# EAGLE board controller (EAGLE 7.3.0)
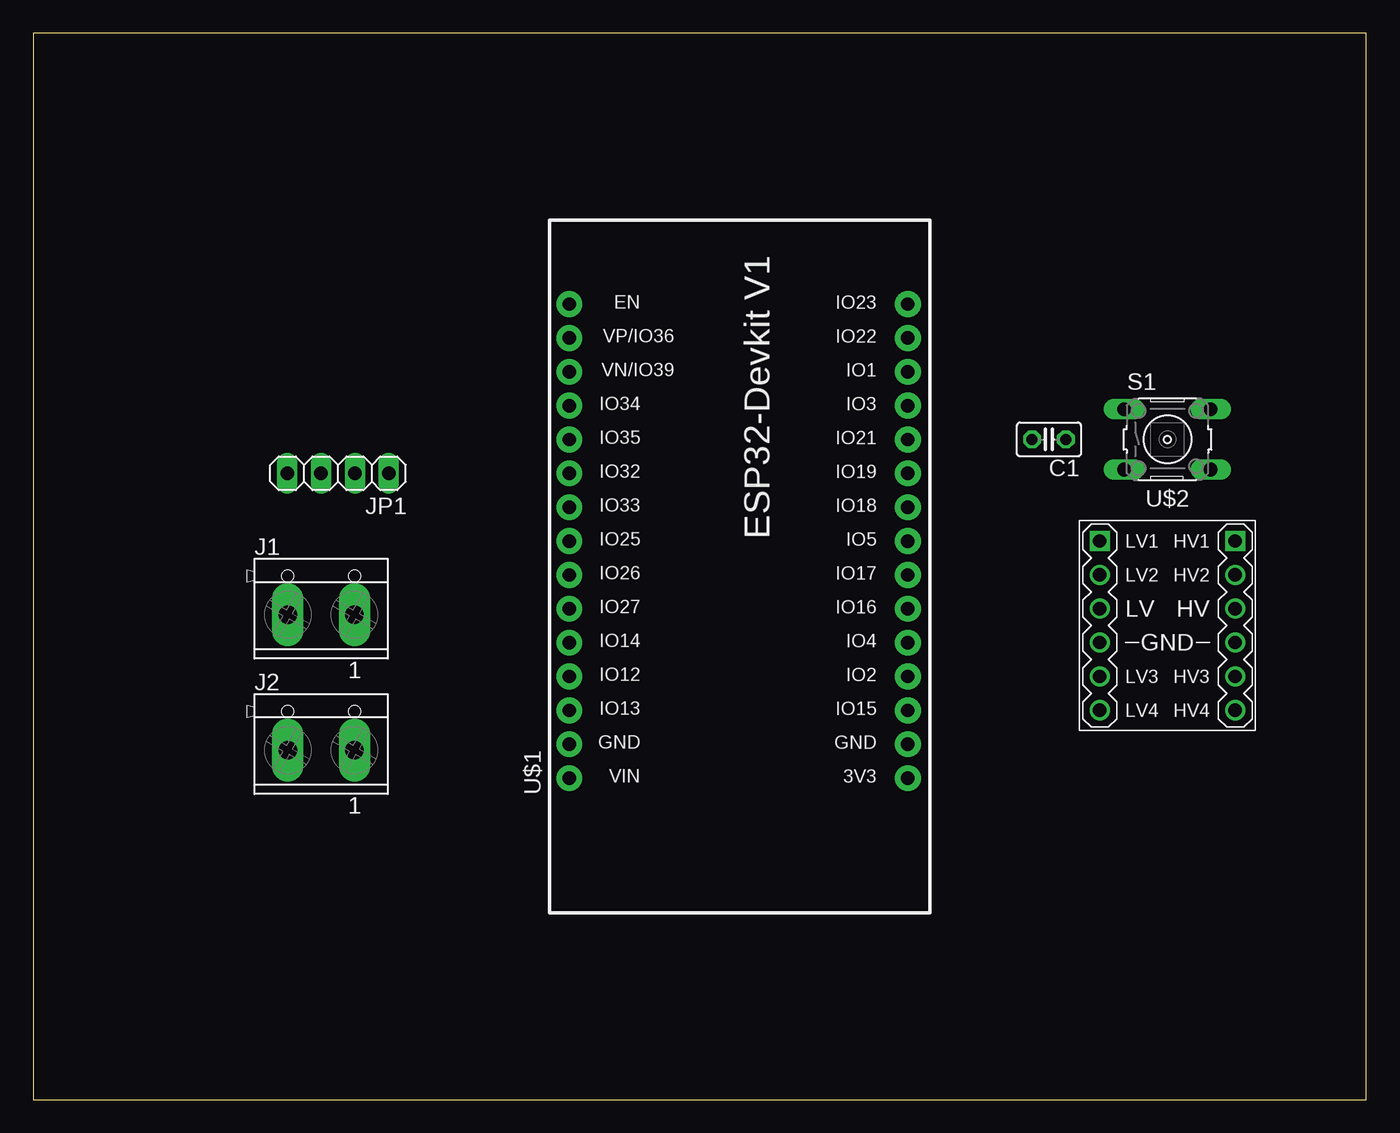
[diagram p0: board, top side]
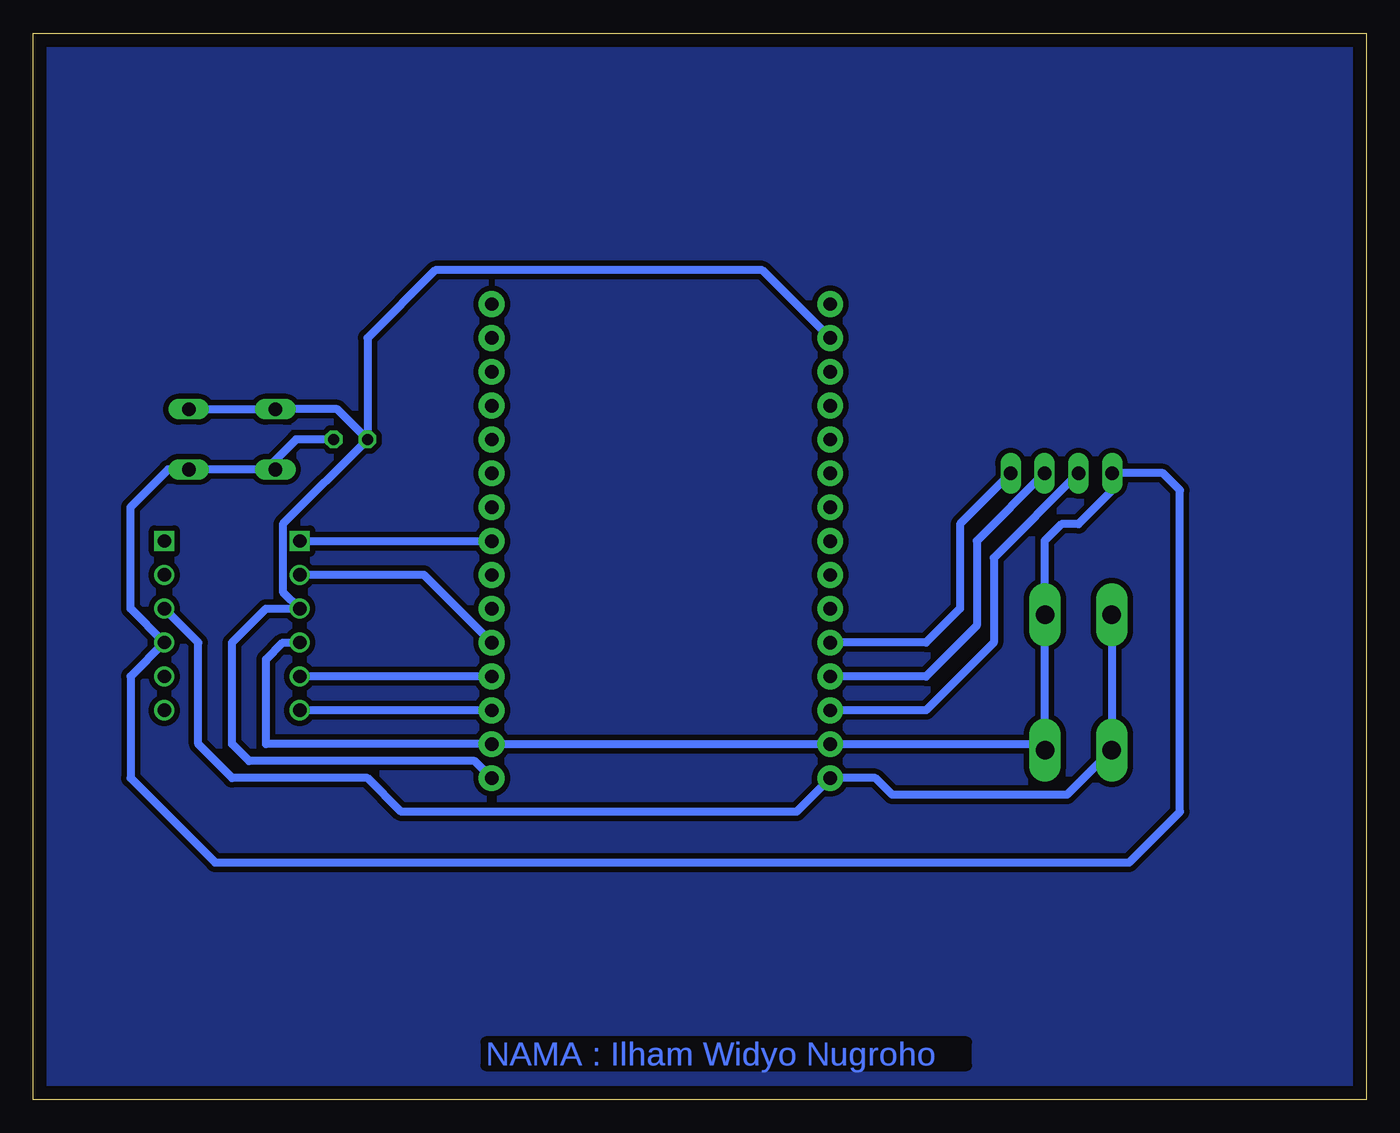
[diagram p1: board, bottom side, seen from below]

Size 100 x 80 mm. Coordinates in mm from the lower left corner, seen from the top.
Outline: 0,0 100,0 100,80 0,80 0,0
Copper layers (1*16): Top 0.035mm / dielectric 1.5mm / Bottom 0.035mm
Design rules "default": minimum track width 10mil, minimum drill 24mil, track to track 8mil, track to pad 8mil, pad to pad 8mil, via to via 8mil, smd to smd 8mil, copper to edge 40mil, drill to drill 8mil, minimum pad ring 10mil, minimum via ring 8mil, stop-mask expansion 4mil, vias tented up to drill 0mil, thermal gap 10mil

## Footprints (pad centres in the part's own frame; a part is rotated, then mirrored left to right if it is on the bottom)
C025-025X050 = drill 0.813 octagon: 1 -1.27,0; 2 1.27,0
TERMINAL_BLOCK_2P_5 = drill 1.4 pad 2.38 long: 1 2.5,-0.45; 2 -2.5,-0.45
1X04 = drill 1.016 long: 1 -3.81,0; 2 -1.27,0; 3 1.27,0; 4 3.81,0
B3F-10XX = drill 1.016 long: 1 -3.251,2.261; 2 3.251,2.261; 3 -3.251,-2.261; 4 3.251,-2.261
ESP32-DEVKITV1 = drill 1 pad 1.93: 3V3 -16.52,-12.27; D1 13.96,-12.27; D2 -8.9,-12.27; D3 11.42,-12.27; D4 -6.36,-12.27; D5 1.26,-12.27; D12 -8.9,13.135; D13 -11.44,13.135; D14 -6.36,13.135; D15 -11.44,-12.27; D16 -3.82,-12.27; D17 -1.28,-12.27; D18 3.8,-12.27; D19 6.34,-12.27; D21 8.88,-12.27; D22 16.5,-12.27; D23 19.04,-12.27; D25 1.26,13.135; D26 -1.28,13.135; D27 -3.82,13.135; D32 6.34,13.135; D33 3.8,13.135; D34 11.42,13.135; D35 8.88,13.135; D36 16.5,13.135; D39 13.96,13.135; EN 19.04,13.135; GND@1 -13.98,13.135; GND@2 -13.98,-12.27; VIN -16.52,13.135
LEVEL-SHIFTER-4CH = drill 1 square: J1.1 -5.08,6.35; J2.1 5.08,6.35 | drill 1: J1.2 -5.08,3.81; J1.3 -5.08,1.27; J1.4 -5.08,-1.27; J1.5 -5.08,-3.81; J1.6 -5.08,-6.35; J2.2 5.08,3.81; J2.3 5.08,1.27; J2.4 5.08,-1.27; J2.5 5.08,-3.81; J2.6 5.08,-6.35

## Placement (x,y rotation side)
C1  [C025-025X050]  76.2,49.53 180 top
J1  CON_TERMINAL_BLOCK_02-5MM  [TERMINAL_BLOCK_2P_5]  21.59,36.83 0 top
J2  CON_TERMINAL_BLOCK_02-5MM  [TERMINAL_BLOCK_2P_5]  21.59,26.67 0 top
JP1  [1X04]  22.86,46.99 180 top
S1  [B3F-10XX]  85.09,49.53 0 top
U$1  ESP32DEVKITV1  [ESP32-DEVKITV1]  53.34,40.64 90 top
U$2  LEVEL-SHIFTER-4CH  [LEVEL-SHIFTER-4CH]  85.09,35.56 0 top

## Library data of the parts
C1 = rcl; SPICEPREFIX: C
J1 J2 = tblok
JP1 = pinhead
S1 = switch-omron; MPN: B3F-1000; OC_FARNELL: 176432; OC_NEWARK: 36M3542
U$1 = esp32-devkitv1
U$2 = diy-model

## Nets
GND: C1.1 J1.1 J2.1 JP1.4 S1.3 S1.4 U$1.GND@1 U$1.GND@2 U$2.J1.4 U$2.J2.4
HV: J1.2 J2.2 U$1.VIN U$2.J2.3
LV: C1.2 S1.1 S1.2 U$1.3V3 U$1.D36 U$2.J1.3
LV1: U$1.D5 U$2.J1.1
LV2: U$1.D4 U$2.J1.2
LV3: U$1.D2 U$2.J1.5
LV4: U$1.D15 U$2.J1.6
OUT1: JP1.1 U$1.D14
OUT2: JP1.2 U$1.D12
OUT3: JP1.3 U$1.D13

## Tracks (layer width: path | path; a pad name or v marks a point on that pad's centre or on a via)
GND
  Bottom 0.61: S1.3 82.55,47.27 | 82.55,47.27 S1.4 89.89,47.27 92.71,44.45 92.71,36.83 U$2.J2.4 92.71,31.75 92.71,24.13 86.36,17.78 17.78,17.78 13.97,21.59 13.97,45.72 15.24,46.99 JP1.4 19.05,45.72 21.59,43.18 22.86,43.18 24.13,41.91 24.13,36.42 J1.1 24.13,36.34 24.13,25.4 24.09,25.44 J2.1 24.53,26.66 U$1.GND@1 40.64,26.67 40.65,26.66 U$1.GND@2 82.55,26.67 82.55,33.02 81.28,34.29 U$2.J1.4 | C1.1 80.29,49.53 82.55,47.27
HV
  Bottom 0.61: J1.2 J2.2 22.45,22.86 35.56,22.86 36.82,24.12 U$1.VIN 42.73,21.59 72.39,21.59 74.93,24.13 85.09,24.13 87.63,26.67 87.63,34.29 U$2.J2.3
LV
  Bottom 0.61: U$1.D36 45.3,62.23 69.85,62.23 74.93,57.15 C1.2 | C1.2 77.19,51.79 S1.1 S1.2 | C1.2 81.28,43.18 81.28,38.1 U$2.J1.3 82.55,36.83 85.09,34.29 85.09,26.67 83.82,25.4 66.89,25.4 U$1.3V3
LV1
  Bottom 0.61: U$2.J1.1 66.04,41.91 66.03,41.9 U$1.D5
LV2
  Bottom 0.61: U$1.D4 70.7,39.37 U$2.J1.2
LV3
  Bottom 0.61: U$1.D2 U$2.J1.5
LV4
  Bottom 0.61: U$1.D15 U$2.J1.6
N$1
  pour Bottom (isolate 0.406): 0,80.01 0,0 100.33,0 100.33,80.01
OUT1
  Bottom 0.61: JP1.1 30.48,43.18 30.48,36.83 33.03,34.28 U$1.D14
OUT2
  Bottom 0.61: JP1.2 29.21,41.91 29.21,35.56 33.03,31.74 U$1.D12
OUT3
  Bottom 0.61: JP1.3 27.94,40.64 27.94,34.29 33.03,29.2 U$1.D13

## Text on the board
Bottom: NAMA : Ilham Widyo Nugroho | NAMA : Ilham Widyo Nugroho